# Altium PCB PCB_Hexbiev2_2026-10-09.pcbdoc
Units mil, origin at the board's own origin, x right, y up, seen from the top; angles counter-clockwise.
Board outline 4909.4 x 5375 mil, 2 copper layers (Top Layer, Bottom Layer); 11 components, 33 nets, 55 pads, 6 vias.
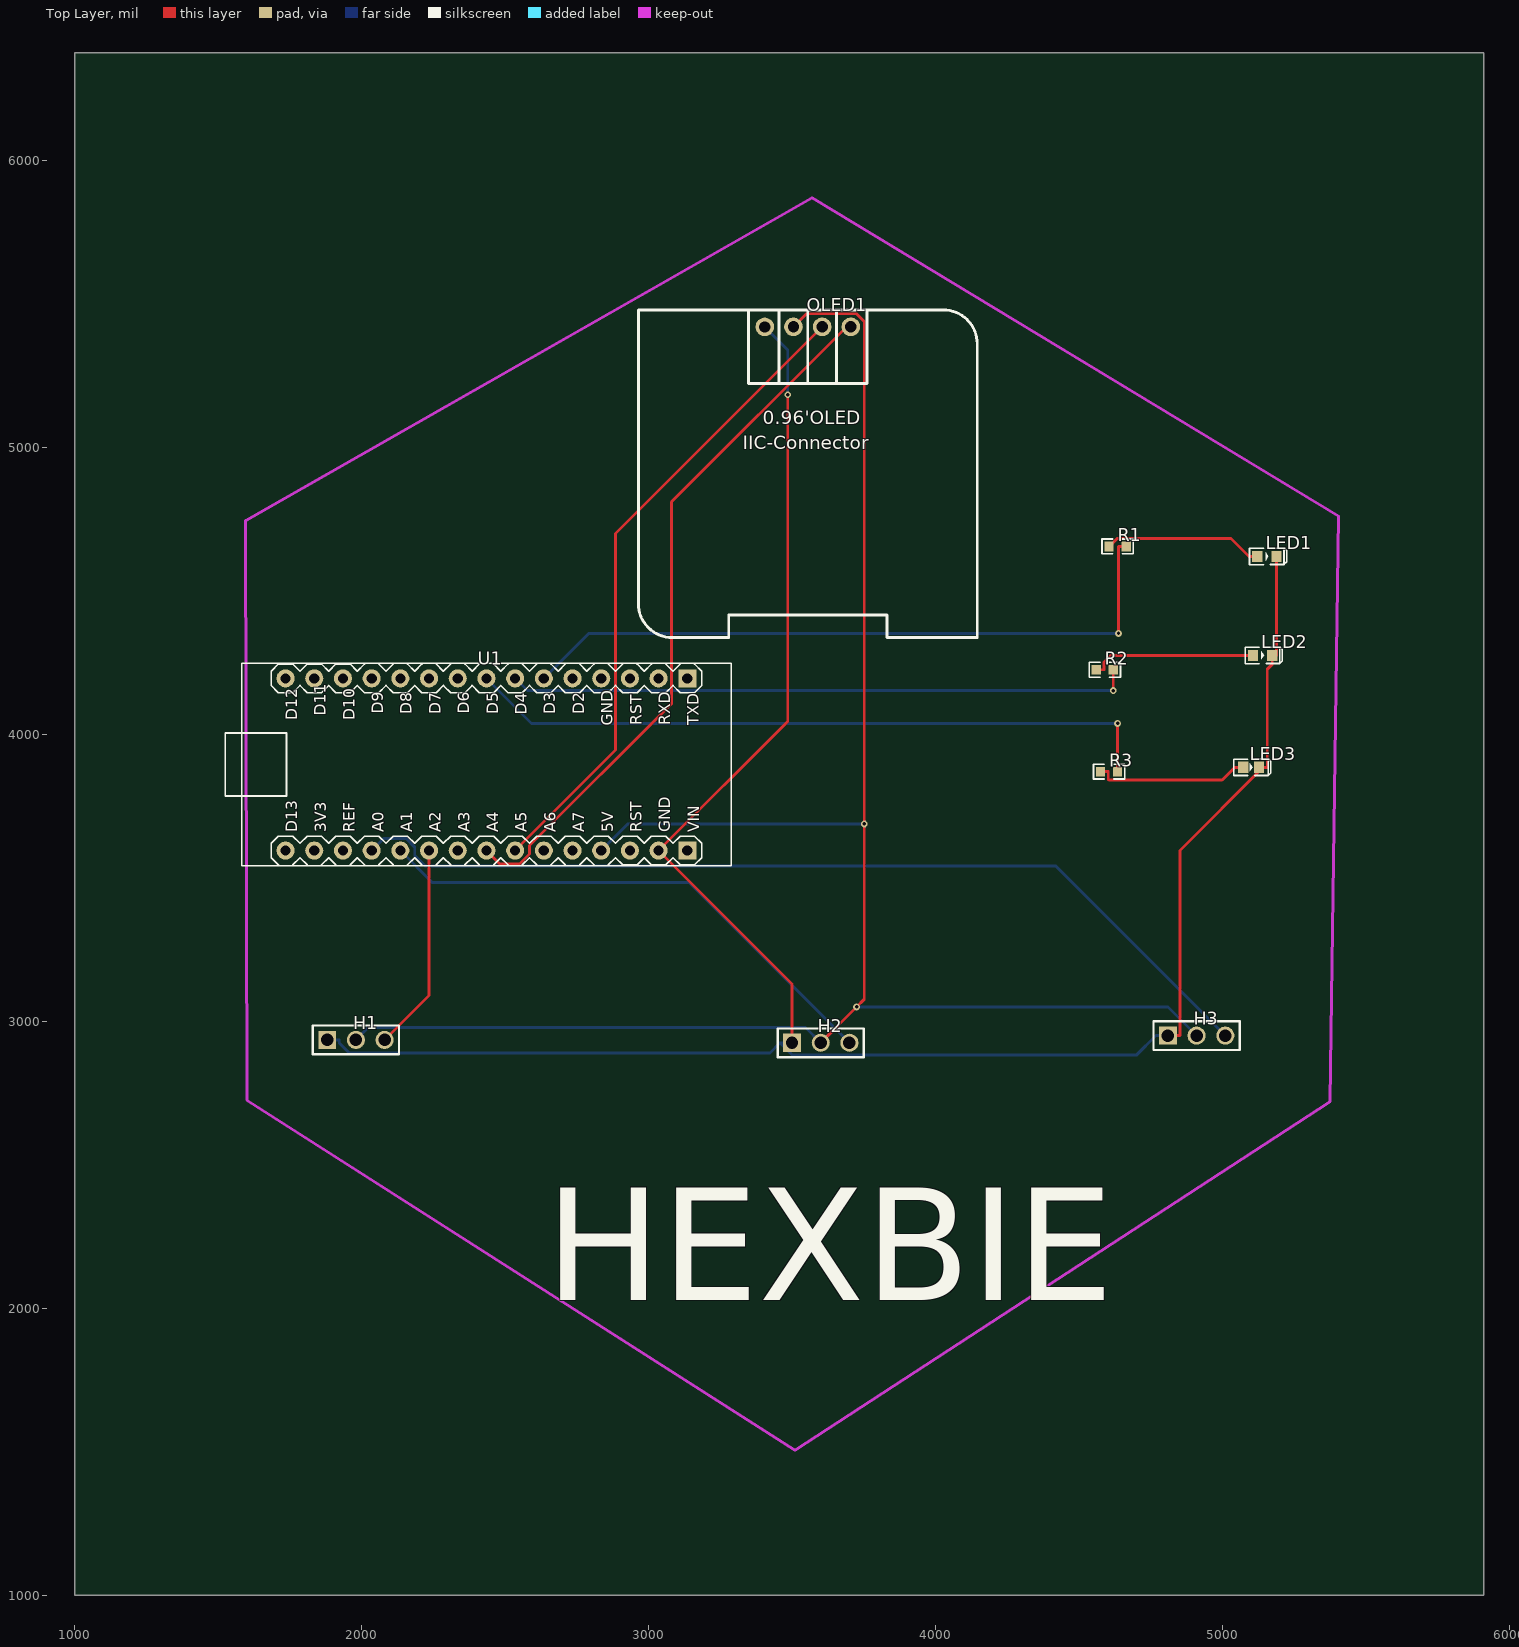
[diagram p0: Top Layer view]
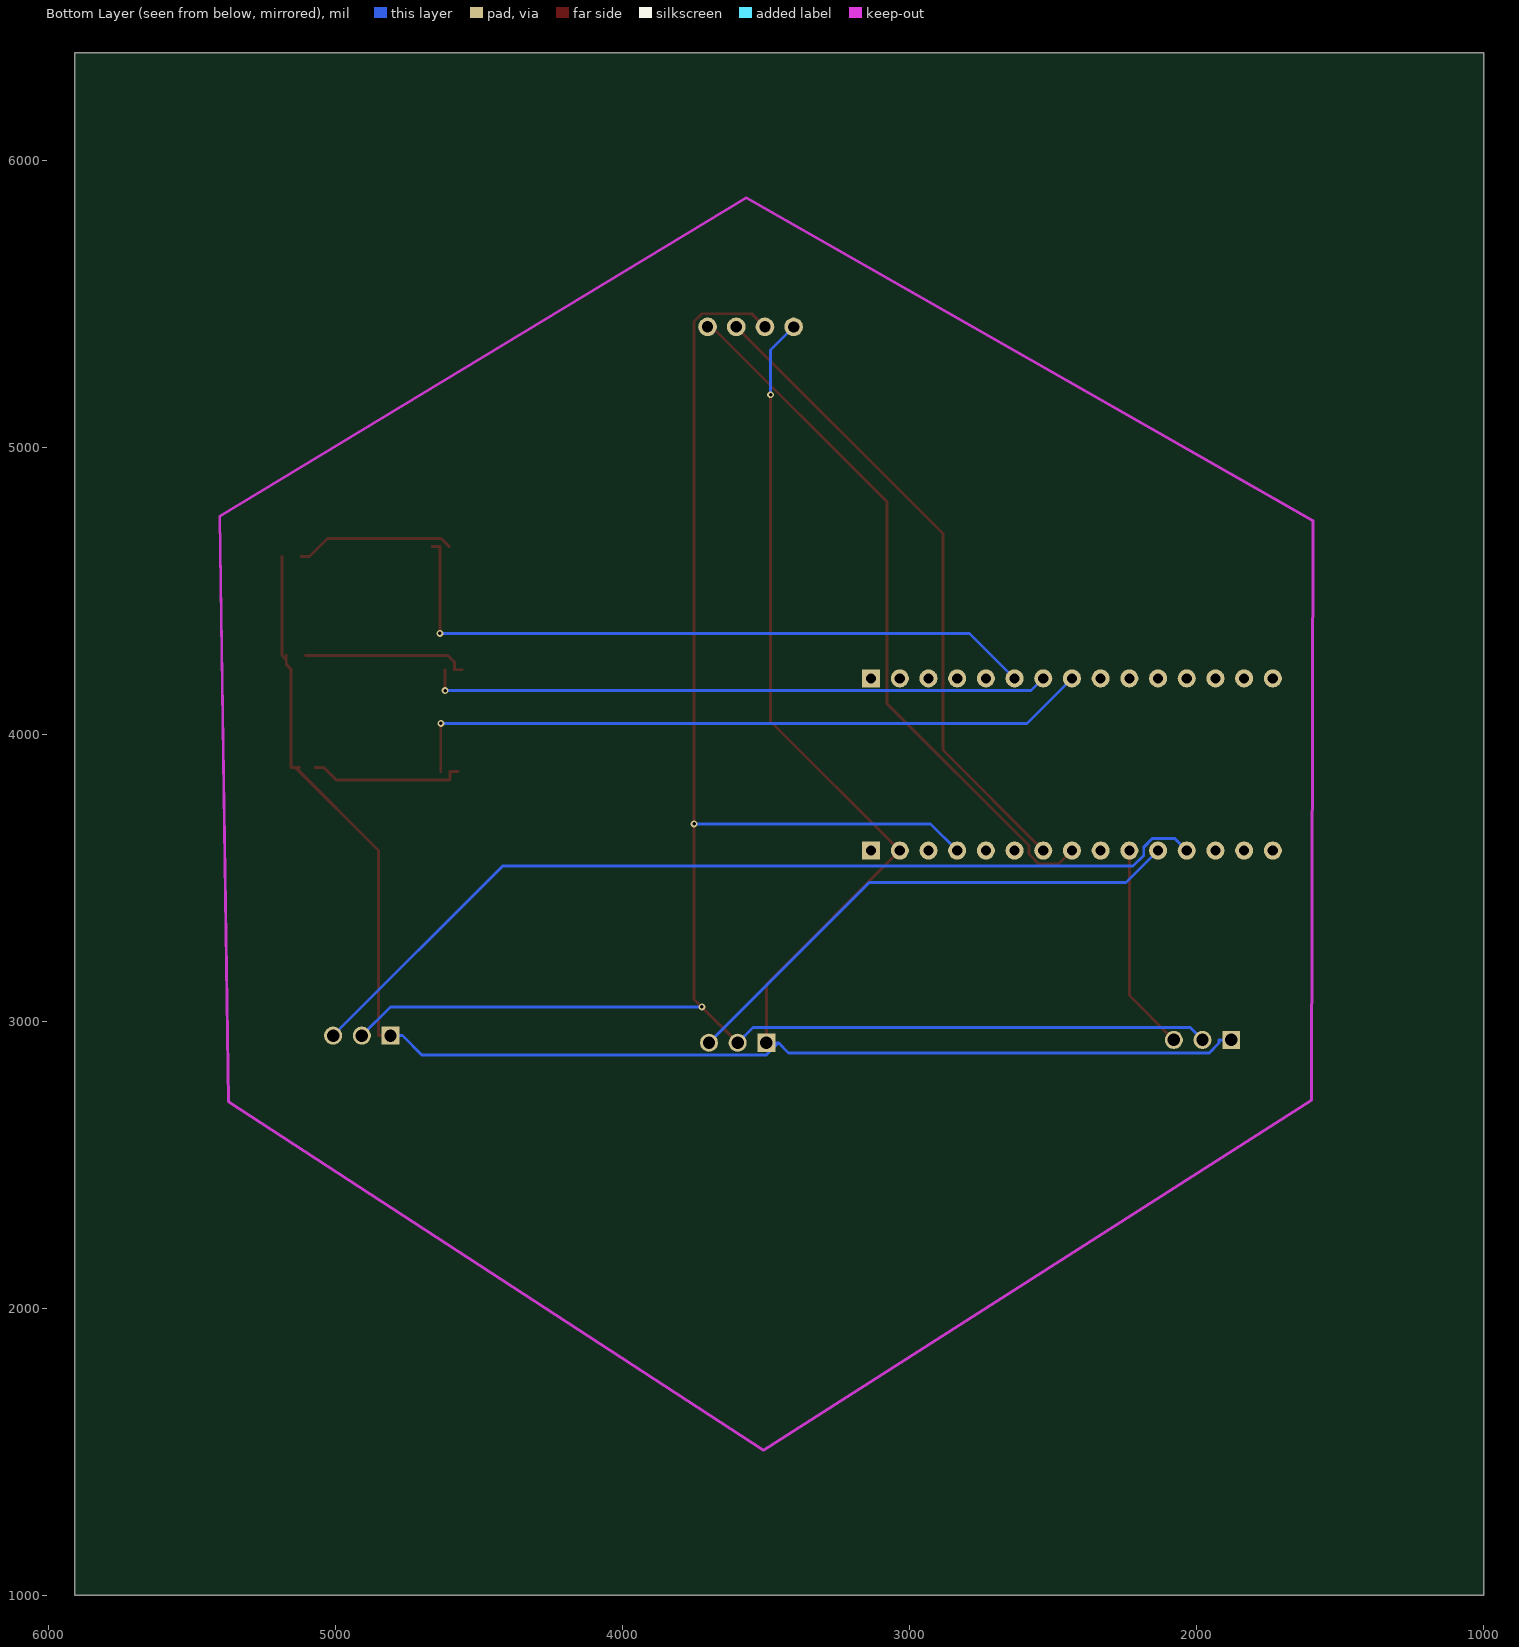
[diagram p1: Bottom Layer view, seen from below]

## Layer stack, top to bottom
Top Layer: signal copper (thickness not stored)
Dielectric: dielectric 12.6, FR-4, Dk 4.8
Bottom Layer: signal copper (thickness not stored)

## Board outline
5909.4,1000 1000,1000 1000,6375 5909.4,6375

## Components (designator, comment, footprint, x,y, rotation, side; value= is the part's Value field where it differs from the comment)
H1 "Temp" HDR-TH_3P-P2.54-V-M-1 1979.4,2935 r0 top
H2 "Air" HDR-TH_3P-P2.54-V-M-1 3599.4,2925 r0 top
H3 "Sound" HDR-TH_3P-P2.54-V-M-1 4909.4,2950 r0 top
LED1 "LED-0603_R" LED0603_RED 5154.4,4620 r0 top
LED2 "LED-0603_G" LED0603_GREEN 5139.4,4275 r0 top
LED3 "LED-0603_B" LED0603_BLUE 5099.4,3885 r0 top
OLED1 "0.96OLED_4P_MODULE_JX" 0.96OLED_4P 3554.4,5420 r0 top
R1 "1k" R0603 4634.4,4655 r0 top
R2 "1k" R0603 4589.4,4225 r0 top
R3 "1k" R0603 4604.4,3870 r0 top
U1 "ARDUINO_NANO" COMM-TH_ARDUINO_NANO 2434.4,3895 r0 top

## Footprints (in the part's own frame and the unit in brackets; to place one, negate y for a bottom-side part, rotate by r counter-clockwise, add the part's x,y. Pads: shape width x height; smd on the part's side, far side on the other; paste and mask are expansions set on the pad)
0.96OLED_4P [mm]
  round 1.65 hole 1 paste+0 mask+0.051: 1(-3.81,-0.001) 2(-1.27,0.002) 3(1.27,0.002) 4(3.81,0.002)
  silkscreen extent -15,-27.5 15,1.5
COMM-TH_ARDUINO_NANO [mm]
  rect 1.6x1.6 hole 0.9 paste+0 mask+0.051: 1(17.78,7.62) 30(17.78,-7.62)
  round 1.6 hole 0.9 paste+0 mask+0.051: 2(15.24,7.62) 3(12.7,7.62) 4(10.16,7.62) 5(7.621,7.62) 6(5.08,7.62) 7(2.541,7.62) 8(0,7.62) 9(-2.539,7.62) 10(-5.08,7.62) 11(-7.619,7.62) 12(-10.16,7.62) 13(-12.699,7.62) 14(-15.24,7.62) 15(-17.78,7.62) 16(-17.78,-7.62) 17(-15.241,-7.62) 18(-12.7,-7.62) 19(-10.161,-7.62) 20(-7.62,-7.62) 21(-5.081,-7.62) 22(-2.54,-7.62) 23(-0.001,-7.62) 24(2.54,-7.62) 25(5.079,-7.62) 26(7.62,-7.62) 27(10.159,-7.62) 28(12.7,-7.62) 29(15.24,-7.62)
  silkscreen extent -23.11,-8.97 21.67,8.97
HDR-TH_3P-P2.54-V-M-1 [mm]
  rect 1.575x1.6 hole 1.1 paste+0 mask+0.05: 1(-2.54,0)
  round 1.6 hole 1.1 paste+0 mask+0.05: 2(0,0) 3(2.54,0)
  silkscreen extent -3.81,-1.27 3.81,1.27
LED0603_BLUE [mm]
  rect 0.9x1 smd paste+0 mask+0.051: 1(-0.7,0) 2(0.7,0)
  silkscreen extent -1.54,-0.73 1.75,0.73
LED0603_GREEN [mm]
  rect 0.9x1 smd paste+0 mask+0.051: 1(-0.85,0) 2(0.85,0)
  silkscreen extent -1.54,-0.73 1.75,0.73
LED0603_RED [mm]
  rect 0.9x1 smd paste+0 mask+0.051: 1(-0.85,0) 2(0.85,0)
  silkscreen extent -1.54,-0.73 1.75,0.73
R0603 [mil]
  rect 31.75x34.02 smd paste-3937.01 mask+2: 1(-29.65,0) 2(29.66,0)
  silkscreen extent -55,-26 55,26

## Via types
v1: diameter 24, hole 12, Top Layer to Bottom Layer, tented both sides, 6 vias

## Nets (pads, with @x,y where several pads share a name; then routed paths per layer and width w, separated by ;. In a path a pad name is that pad's centre, name@x,y a point inside that pad or via, vN(x,y) a via of type N, cw(c..) or ccw(c..) an arc to the next point about the centre after c; other vN are vias at no path point)
GND: H1.1 H2.1 H3.1 LED1.2 LED2.2 LED3.2 OLED1.1 U1.29 | length 7854.3
  Top Layer w10: v1(3484.62,5183.33) 3484.62,4045.22 U1.29 3499.4,3130 H2.1 ; H3.1 4851.41,2950 4851.41,3595.09 LED3.2@5141.32,3885 ; LED3.2@5126.95,3885 LED3.2@5141.32,3885 ; LED2.2 LED2.2@5172.86,4259.66 ; LED1.2 5187.87,4274.67 LED2.2@5172.86,4259.66 ; LED3.2@5141.32,3885 5155.68,3885 5155.68,4227.13 5172.86,4244.31 LED2.2@5172.86,4259.66
  Bottom Layer w10: H1.1 1921.41,2935 1921.41,2924.5 1956.13,2889.78 3422.17,2889.78 3457.39,2925 ; OLED1.1 3484.62,5339.73 v1(3484.62,5183.33) ; H2.1 3457.39,2925 ; H3.1 4767.39,2950 4699.25,2881.86 3500.53,2881.86 3457.39,2925
R1_1: LED1.1 R1.1 | length 554
  Top Layer w10: R1.1 4632.81,4683.07 5029.14,4683.07 5092.21,4620 LED1.1
R2_1: LED2.1 R2.1 | length 582.7
  Top Layer w10: R2.1 4586.63,4225 4586.63,4251.89 4609.74,4275 LED2.1
R3_1: LED3.1 R3.1 | length 543.6
  Top Layer w10: R3.1 4601.63,3870 4601.63,3843.11 4604.3,3840.44 4998.55,3840.44 5043.11,3885 LED3.1
U1_1: U1.1
U1_2: U1.2
U1_3: U1.3
U1_4: U1.4
U1_5: U1.5
U1_6: R1.2 U1.6 | length 2397.9
  Top Layer w10: v1(4637.17,4351.65) 4637.17,4655 R1.2
  Bottom Layer w10: U1.6 2791.05,4351.65 v1(4637.17,4351.65)
U1_7: R2.2 U1.7 | length 2174.8
  Top Layer w10: v1(4619.06,4152.45) R2.2
  Bottom Layer w10: U1.7 2576.95,4152.45 v1(4619.06,4152.45)
U1_8: R3.2 U1.8 | length 2432.6
  Top Layer w10: R3.2 v1(4634.06,4037.89)
  Bottom Layer w10: U1.8 2591.51,4037.89 v1(4634.06,4037.89)
U1_9: U1.9
U1_10: U1.10
U1_11: U1.11
U1_12: U1.12
U1_13: U1.13
U1_14: U1.14
U1_15: U1.15
U1_16: U1.16
U1_17: U1.17
U1_18: U1.18
U1_19: H3.3 U1.19 | length 3294.3
  Bottom Layer w10: U1.19 2076.96,3637.56 2153.54,3637.56 2184.4,3606.7 2184.4,3577.86 2221.16,3541.1 4418.3,3541.1 H3.3
U1_20: H2.3 U1.20 | length 1842.5
  Bottom Layer w10: U1.20 2245.74,3483.66 3140.74,3483.66 H2.3
U1_21: H1.3 U1.21 | length 724.2
  Top Layer w10: H1.3 2234.4,3090 U1.21
U1_22: U1.22
U1_23: OLED1.4 U1.23 | length 2493.7
  Top Layer w10: U1.23 2480.87,3548.53 2549.9,3548.53 2584.4,3583.03 2584.4,3612.06 3079.02,4106.68 3079.02,4810.33 3688.74,5420.05 OLED1.4@3704.4,5420.05
U1_24: OLED1.3 U1.24 | length 2268.3
  Top Layer w10: U1.24 2884.4,3945 2884.4,4700.05 OLED1.3@3604.4,5420.05
U1_25: U1.25
U1_26: U1.26
U1_28: U1.28
U1_30: U1.30
VCC: H1.2 H2.2 H3.2 OLED1.2 U1.27 | length 6694.7
  Top Layer w10: OLED1.2@3504.4,5420.05 3550.24,5465.89 3723.59,5465.89 3751.17,5438.31 v1(3751.17,3687.64) 3751.17,3076.77 v1(3724.34,3049.94) H2.2
  Bottom Layer w10: H1.2 2022.33,2977.93 3546.47,2977.93 H2.2 ; U1.27 2927.04,3687.64 v1(3751.17,3687.64) ; v1(3724.34,3049.94) 4809.46,3049.94 H3.2

## Silkscreen, mask and mechanical layers (free items; w line width, h text height)
Top Overlay:
  text "HEXBIE" at 2639.4,2028.15 h393.7

## Text inside footprints (layer, text, board x,y; h text height)
OLED1: Top Overlay "IIC-Connector" at 3327.8,4992.94 h47.24; Top Overlay "0.96'OLED" at 3397,5081.43 h47.24
U1: Top Overlay "D13" at 1775.65,3659.17 h39.37 r90; Top Overlay "3V3" at 1875.65,3659.17 h39.37 r90; Top Overlay "REF" at 1975.65,3659.17 h39.37 r90; Top Overlay "A0" at 2075.65,3659.17 h39.37 r90; Top Overlay "A1" at 2175.65,3659.17 h39.37 r90; Top Overlay "A2" at 2275.65,3659.17 h39.37 r90; Top Overlay "A3" at 2375.65,3659.17 h39.37 r90; Top Overlay "A4" at 2475.65,3659.17 h39.37 r90; Top Overlay "A5" at 2575.65,3659.17 h39.37 r90; Top Overlay "A6" at 2675.65,3659.17 h39.37 r90; Top Overlay "A7" at 2775.65,3659.17 h39.37 r90; Top Overlay "5V" at 2875.65,3659.17 h39.37 r90; Top Overlay "RST" at 2975.65,3659.17 h39.37 r90; Top Overlay "GND" at 3075.65,3659.17 h39.37 r90; Top Overlay "VIN" at 3175.65,3659.17 h39.37 r90; Top Overlay "D12" at 1774.87,4048.5 h39.37 r90; Top Overlay "D11" at 1874.87,4064.6 h39.37 r90; Top Overlay "D10" at 1974.87,4048.5 h39.37 r90; Top Overlay "D9" at 2074.87,4071.1 h39.37 r90; Top Overlay "D8" at 2174.87,4069.3 h39.37 r90; Top Overlay "D7" at 2274.87,4069.3 h39.37 r90; Top Overlay "D6" at 2374.87,4071.1 h39.37 r90; Top Overlay "D5" at 2474.87,4069.3 h39.37 r90; Top Overlay "D4" at 2574.87,4067.5 h39.37 r90; Top Overlay "D3" at 2674.87,4069.3 h39.37 r90; Top Overlay "D2" at 2774.87,4069.3 h39.37 r90; Top Overlay "GND" at 2874.87,4030.6 h39.37 r90; Top Overlay "RST" at 2974.87,4032.4 h39.37 r90; Top Overlay "RXD" at 3074.87,4032.4 h39.37 r90; Top Overlay "TXD" at 3174.87,4032.4 h39.37 r90